# EAGLE board KE3IJ-SuperRegen-FM-receiver (EAGLE 5.07)
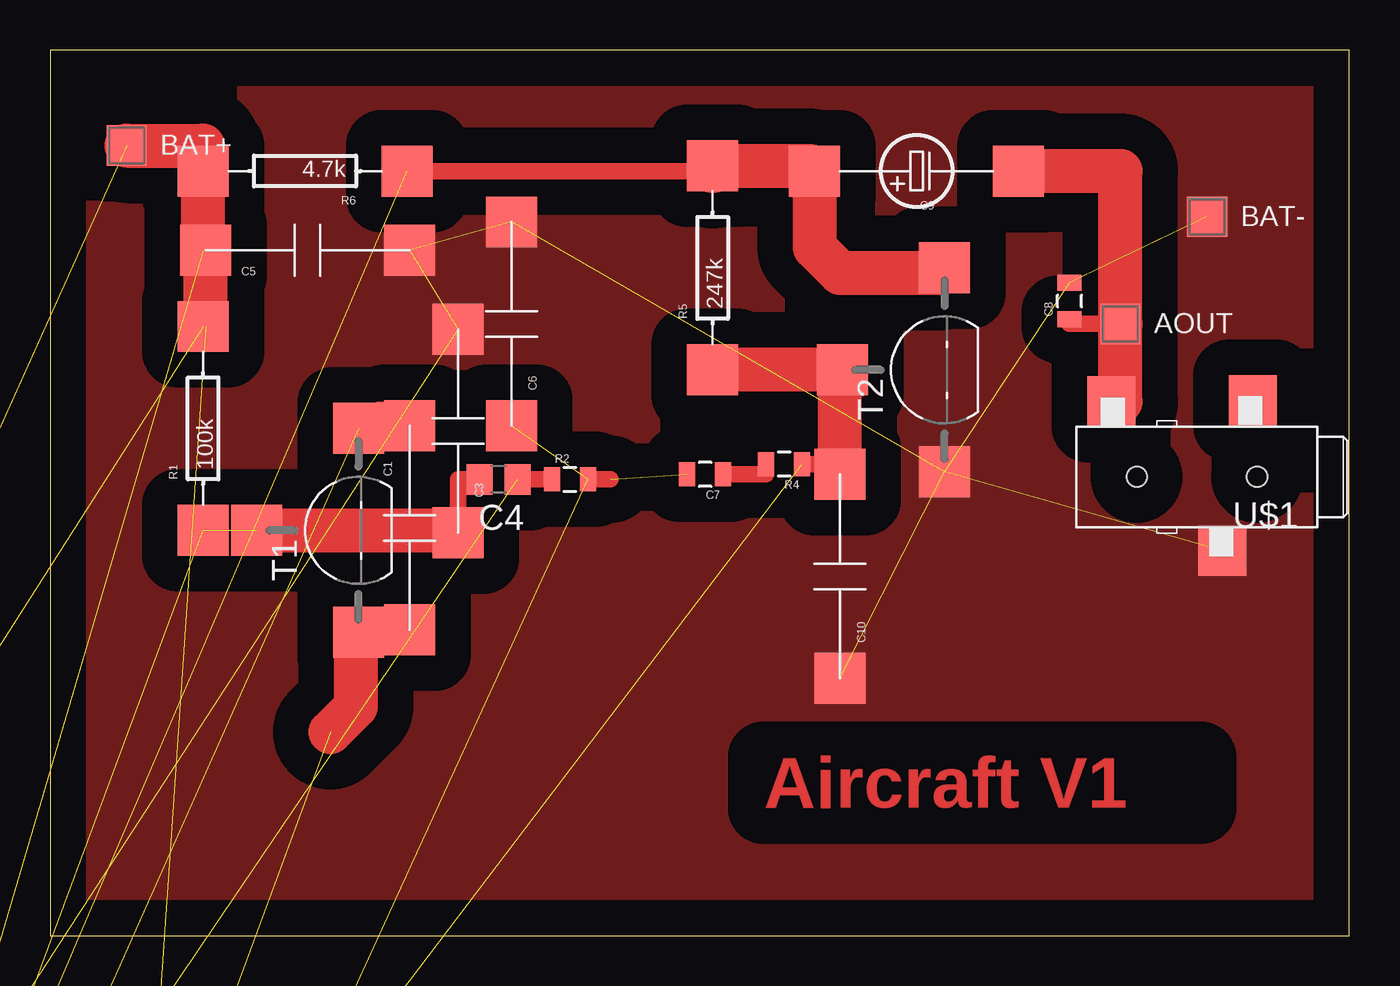
[diagram p0: board, top side]

Size 64.75 x 44.12 mm. Coordinates in mm from the lower left corner, seen from the top.
Outline: 0,0 64.75,0 64.75,44.12 0,44.12 0,0
Copper layers (1*16): Top 0.035mm / dielectric 1.5mm / Bottom 0.035mm
Design rules "SparkFun-RF": minimum track width 8mil, minimum drill 20mil, track to track 8mil, track to pad 8mil, pad to pad 8mil, via to via 8mil, smd to smd 0mil, copper to edge 10mil, drill to drill 8mil, minimum pad ring 12mil, minimum via ring 10mil, stop-mask expansion 4mil, vias tented up to drill 25mil, thermal gap 10mil

## Footprints (pad centres in the part's own frame; a part is rotated, then mirrored left to right if it is on the bottom)
ANT-WISP-2PAD = smd 2.54 x 2.54: P$3 -5.08,0; P$4 5.08,0
SMD20S = smd 2 x 2: PAD 0,0
CAP-SMD-SMALL = smd 2.54 x 2.54: P$1 5.08,0; P$2 -5.08,0
C0805 = smd 1.3 x 1.5: 1 -0.95,0; 2 0.95,0
0805 = smd 0.8 x 1.2: 1 -0.9,0; 2 0.9,0
CPOL-SMD-10UF-25V = smd 2.54 x 2.54: + 5.08,0; - -5.08,0
CT6032 = smd 2.6 x 2.2: + -2.5,0; - 2.5,0
D-2,5 = drill 0.813 pad 1.6 octagon: A -1.27,0; K 1.27,0
2.54CM-U-COIL = smd 2.54 x 2.54: P$3 -5.08,0; P$4 5.08,0
B25P = drill 0.813 pad 1.93 octagon: A -2.54,0; E 2.54,0; S 0,2.54
AXIAL-0.3-SMD = smd 2.54 x 2.54: P$1 -5.08,0; P$2 5.08,0
TO92-EBC-SMD-MIRROR = smd 2.54 x 2.54: B 0,5.08; C 5.08,0; E -5.08,0
MIN-AUDIO-3.5MM = smd 2.4 x 2.5: 1 -2.794,-3.81; 2 4.257,-3.754; 3 -1.27,3.683 | hole 1: -3,0; 3,0

## Placement (x,y rotation side)
ANT1  60cm fold back and twist  [ANT-WISP-2PAD]  -34.29,-71.12 0 top  (outside the outline)
AOUT  PAD-SMD20S  [SMD20S]  53.34,30.48 0 top
BAT+  PAD-SMD20S  [SMD20S]  3.81,39.37 0 top
BAT-  PAD-SMD20S  [SMD20S]  57.66,35.81 0 top
C1  10pf  [CAP-SMD-SMALL]  17.91,20.32 270 top
C2  300p  [CAP-SMD-SMALL]  -3.81,-24.13 0 top  (outside the outline)
C3  102  [CAP-SMD-SMALL]  20.32,25.15 90 top
C4  0.47uF  [C0805]  22.35,22.73 180 top
C5  104  [CAP-SMD-SMALL]  12.83,34.16 0 top
C6  102  [CAP-SMD-SMALL]  22.99,30.48 90 top
C7  0.47uf  [0805]  32.64,22.99 180 top
C8  33n,333  [0805]  50.8,31.62 90 top
C9  2.2uF  [CPOL-SMD-10UF-25V]  43.18,38.1 180 top
C10  103,10n  [CAP-SMD-SMALL]  39.37,17.91 90 top
C11  20pF  [C0805]  -29.21,-55.88 0 top  (outside the outline)
C12  2200pF  [CAP-SMD-SMALL]  0,-8.89 0 top  (outside the outline)
C13  6.8p-12p  [CAP-SMD-SMALL]  0,-13.97 0 top  (outside the outline)
C14  33n,333  [CAP-SMD-SMALL]  0,-19.05 0 top  (outside the outline)
C15  47uF  [CT6032]  -26.67,-43.18 0 top  (outside the outline)
C16  104  [CAP-SMD-SMALL]  -25.4,-64.77 0 top  (outside the outline)
D1  BB910  [D-2,5]  -29.21,-49.53 0 top  (outside the outline)
L1  4T, 5mm Diameter  [2.54CM-U-COIL]  -3.81,-29.21 0 top  (outside the outline)
L2  4T ferrite toroid  [2.54CM-U-COIL]  -3.81,-33.02 0 top  (outside the outline)
P1  33k  [B25P]  -19.05,-27.94 0 top  (outside the outline)
P2  200k  [B25P]  -27.94,-27.94 0 top  (outside the outline)
P3  47k  [B25P]  -36.83,-63.5 0 top  (outside the outline)
R1  100k  [AXIAL-0.3-SMD]  7.62,25.27 90 top
R2  12K  [0805]  25.91,22.73 0 top
R3  1k  [AXIAL-0.3-SMD]  -25.4,-36.83 0 top  (outside the outline)
R4  22K  [0805]  36.58,23.5 180 top
R5  247k  [AXIAL-0.3-SMD]  33.02,33.27 90 top
R6  4.7k  [AXIAL-0.3-SMD]  12.7,38.1 180 top
R7  4.7k  [0805]  -12.7,-31.75 0 top  (outside the outline)
R8  100k  [AXIAL-0.3-SMD]  -25.4,-60.96 0 top  (outside the outline)
T1  9018  [TO92-EBC-SMD-MIRROR]  15.37,20.19 90 top
T2  9014  [TO92-EBC-SMD-MIRROR]  44.58,28.19 90 top
U$1  AUDIO-A3.5  [MIN-AUDIO-3.5MM]  57.15,22.86 180 top

## Library data of the parts
ANT1 D1 L1 L2 = dtoy-RF
AOUT BAT+ BAT- = dpads
C1-C6 C9-C16 P1-P3 R1-R8 T1 T2 U$1 = digital-toy
C7 C8 = SparkFun

## Nets
GND: BAT-.PAD C3.P$1 C5.P$1 C6.P$1 C8.2 C10.P$2 C12.P$2 C14.P$1 C15.- C16.P$1 D1.A P1.A P1.S P3.A T2.E U$1.3
N$1: C1.P$2 C11.1 L1.P$3 T1.C
N$2: C2.P$1 C10.P$1 R4.1 R5.P$1 T2.B
N$3: ANT1.P$3 C1.P$1 C13.P$1 T1.E
N$4: C3.P$2 C4.2 C13.P$2 R1.P$1 T1.B
N$5: C4.1 C14.P$2 R2.1
N$6: C6.P$2 C7.2 L2.P$4 P1.E R2.2
N$7: C7.1 R4.2
N$8: AOUT.PAD C8.1 C9.- U$1.2
N$9: C2.P$2 C9.+ R5.P$2 R6.P$1 T2.C
N$10: ANT1.P$4 L2.P$3
N$11: C5.P$2 C12.P$1 L1.P$4 P2.E R7.1
N$12: C11.2 D1.K R8.P$1
N$13: P2.A P2.S R1.P$2
N$14: C16.P$2 P3.S R8.P$2
N$15: C15.+ R3.P$2 R6.P$2 R7.2
VCC: BAT+.PAD P3.E R3.P$1

## Tracks (layer width: path | path; a pad name or v marks a point on that pad's centre or on a via)
GND  (15 unrouted)
  pour Top (isolate 1.778, no thermals): -6.35,44.45 68.58,44.45 72.39,40.64 72.39,5.08 60.96,-6.35 5.08,-6.35 -6.35,5.08
N$1  (2 unrouted)
  Top 2.184: 16.51,25.53 16.51,25.4 15.37,25.4 T1.C 17.91,25.27 C1.P$2
N$2  (1 unrouted)
  Top 0.254: 39.37,28.07 T2.B
  Top 0.813: R4.1 38.86,23.5 C10.P$1
  Top 2.184: T2.B R5.P$1 | 39.37,22.86 C10.P$1 39.37,28.07
N$3  (2 unrouted)
  Top 2.184: C1.P$1 17.91,15.11 T1.E 15.24,15.11 15.24,11.43 13.97,10.16
N$4  (2 unrouted)
  Top 0.813: C4.2 20.32,22.73 20.32,20.19
  Top 2.184: T1.B 19.05,20.19 | 19.05,20.19 20.32,20.19 | 19.05,20.19 C3.P$2
N$5  (1 unrouted)
  Top 0.813: C4.1 R2.1
N$6  (4 unrouted)
  Top 0.813: R2.2 27.94,22.73
N$7
  Top 0.813: C7.1 35.68,22.99 R4.2
N$8
  Top 0.813: AOUT.PAD 50.8,30.48 C8.1
  Top 2.184: U$1.2 53.34,26.61 AOUT.PAD 53.34,38.1 C9.-
N$9  (1 unrouted)
  Top 0.254: 37.85,38.35 C9.+ | 44.32,33.02 T2.C
  Top 0.813: R6.P$1 32.77,38.1 R5.P$2
  Top 2.184: 33.02,38.1 R5.P$2 37.85,38.35 | C9.+ 38.1,34.29 39.37,33.02 44.32,33.02
N$10  (1 unrouted)
N$11  (4 unrouted)
  Top 2.184: 7.75,34.29 C5.P$2 7.75,30.35
N$12  (2 unrouted)
N$13  (2 unrouted)
N$14  (2 unrouted)
N$15  (3 unrouted)
  Top 2.184: 7.62,34.16 R6.P$2
VCC  (2 unrouted)
  Top 2.184: BAT+.PAD 7.62,39.37

## Text on the board
Top: Aircraft V1